# Altium PCB rNET_POE_Sensor_RevA1.PCBDOC (part 2 of 3)
Units mil, origin at the board's own origin, x right, y up, seen from the top; angles counter-clockwise.
Board outline 3750 x 2245 mil, 6 copper layers (TopLayer, Mid Layer 1, Mid Layer 2, Mid Layer 3, Mid Layer 4, BottomLayer), stack 60.4 mil thick; 269 components, 206 nets, 1048 pads, 579 vias.
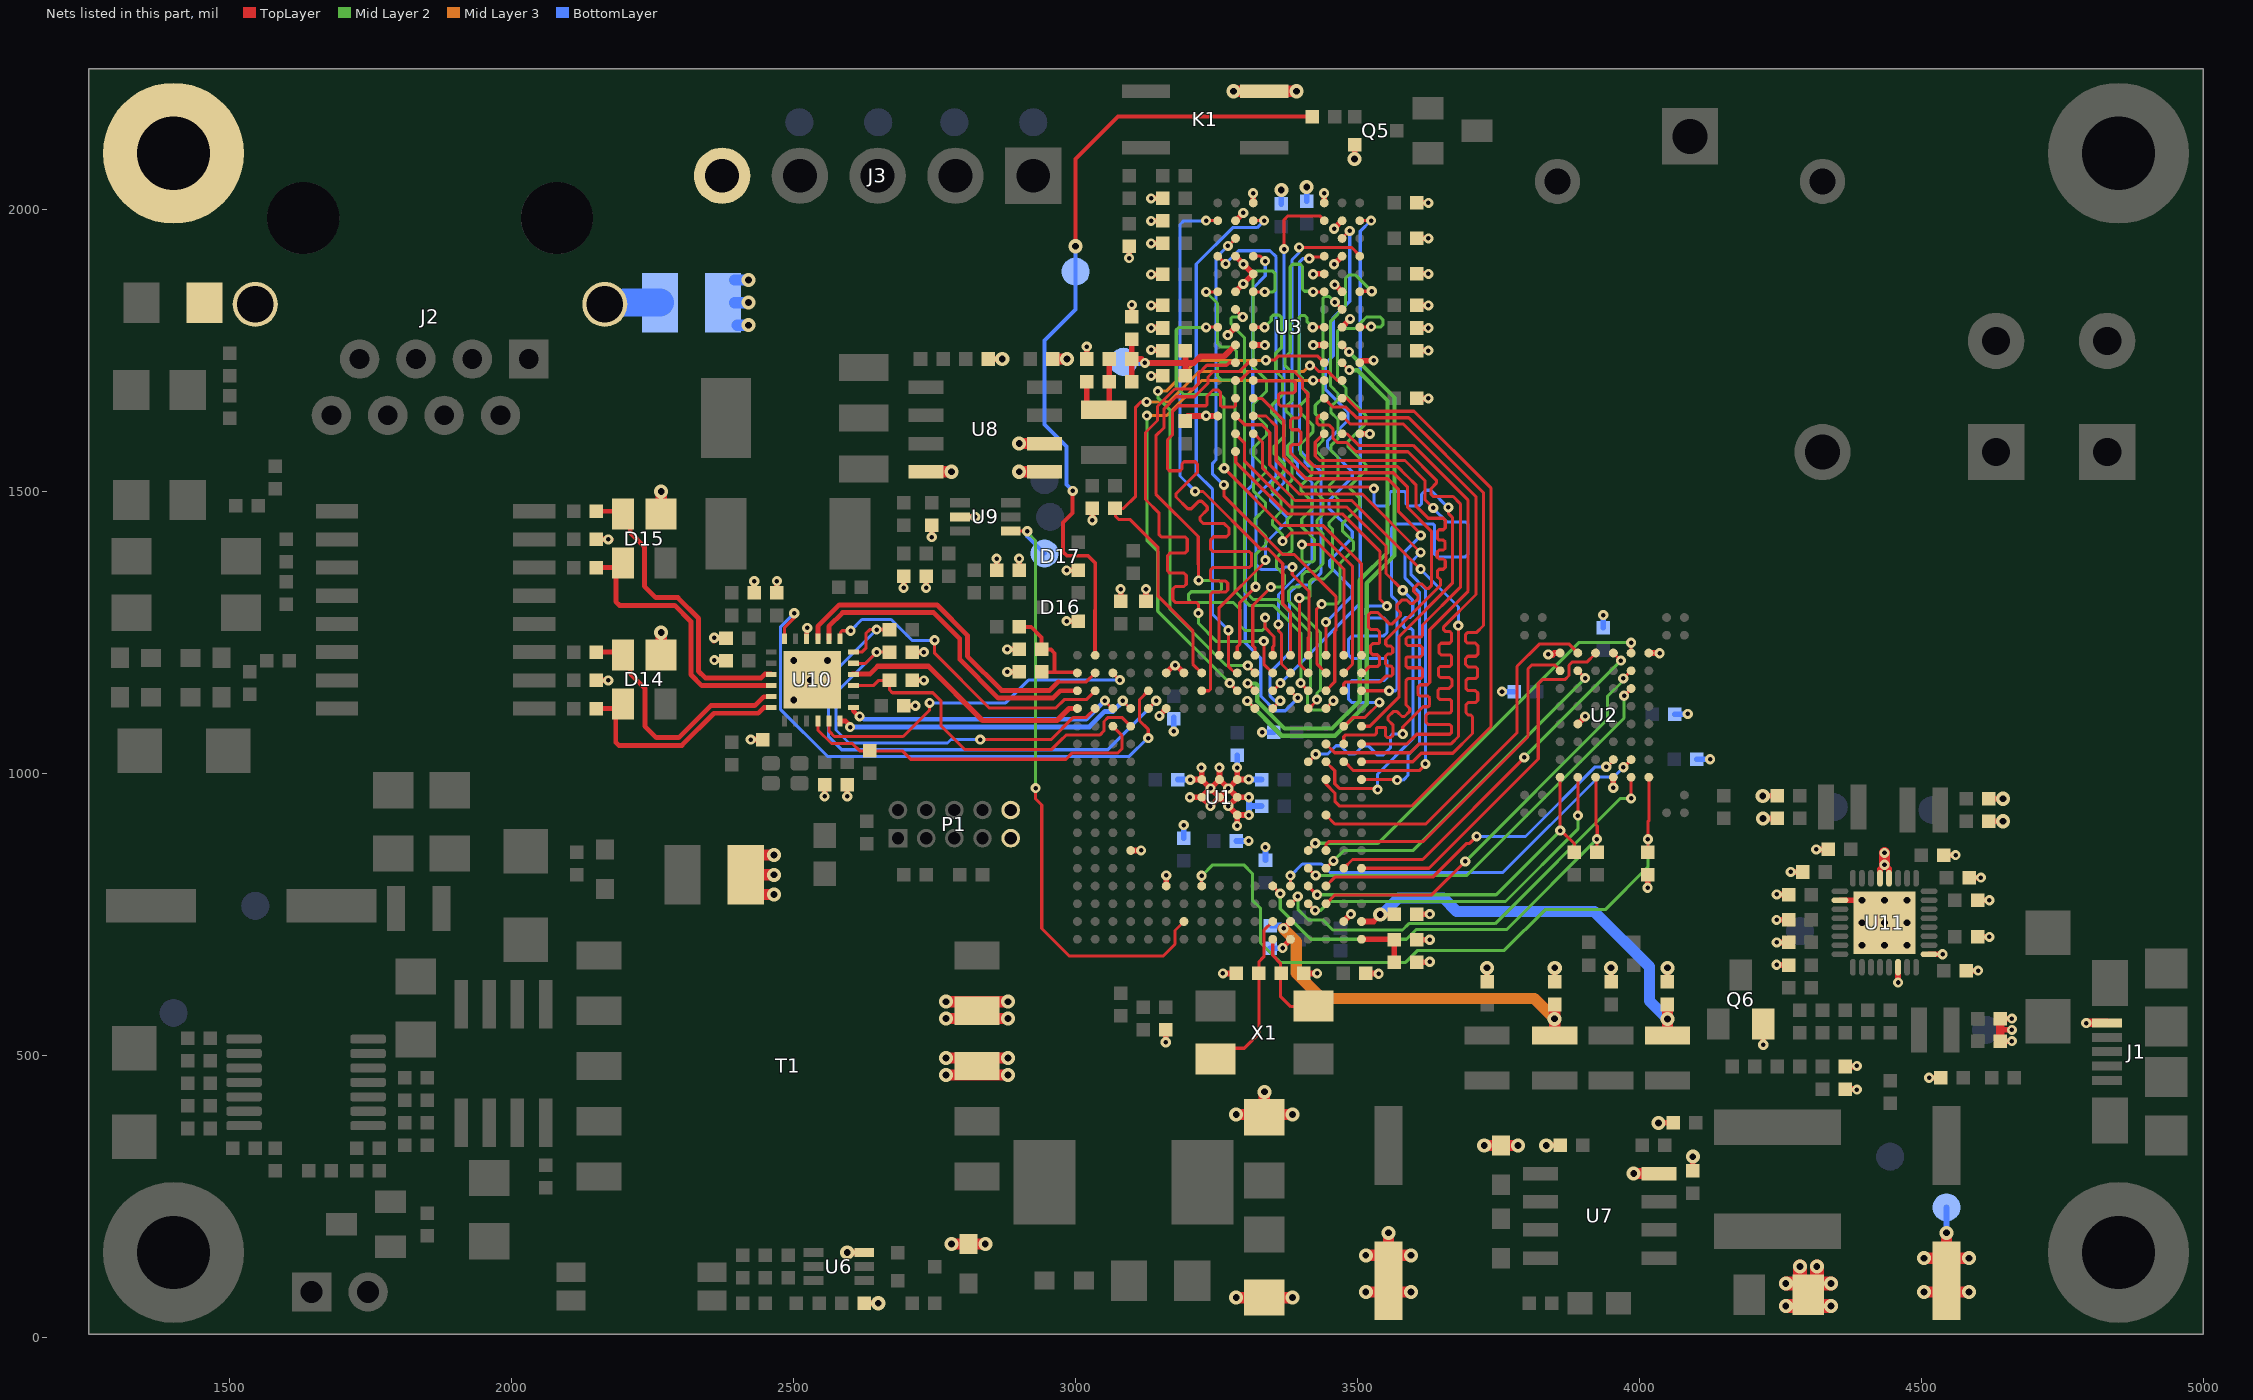
[diagram p6: the nets of this part, all layers, seen from the top]

## Via types
v1: diameter 25, hole 12, TopLayer to BottomLayer, 212 vias
v2: diameter 18, hole 8, TopLayer to BottomLayer, tented top, 187 vias
v3: diameter 18, hole 8, TopLayer to BottomLayer, 171 vias
v4: diameter 18, hole 8, TopLayer to BottomLayer, tented both sides, 7 vias
v5: diameter 25, hole 12, TopLayer to BottomLayer, tented top, 2 vias

## Nets (pads, with @x,y where several pads share a name; then routed paths per layer and width w, separated by ;. In a path a pad name is that pad's centre, name@x,y a point inside that pad or via, vN(x,y) a via of type N, cw(c..) or ccw(c..) an arc to the next point about the centre after c; other vN are vias at no path point) (continued)
AC_RELAY_ON: R63.2 TP12.1 U1.A2 | length 1437.2
  TopLayer w7: v3(2995,1501) 2995,1462 2978,1445 2978,1393 2985,1386 3022.04,1385.96 3034.95,1373.03 U1.A2@3034.8,1209.6 ; v1(3000,1935) 3000,2090 3075,2165 R63.2@3419,2165
  BottomLayer w7: v3(2995,1501) 2984,1512 2984,1580 2945,1619 2945,1768 3000,1823 TP12.1@3000,1890 v1(3000,1935) v1@3000,1946
CHASSIS: C40.2 C73.1 J2.11 J2.12 TP17.1 | length 63
  BottomLayer w50: J2.12@2200,1835 C40.2@2263,1835
"DAC SYNC": TP6.1 U1.T7 U9.1 | length 1111.5
  TopLayer w5.5: U9.1@2884.3,1430.7 2884.86,1429.9 2885,1429.7 2914.4,1429.81 v3@2914.6,1429.8 ; v3(2929,974) 2929,955 2940,944 2940,724.9 2989.2,675.7 3155.2,675.7 3176.5,697 3176.5,721.38 U1.T7@3192.28,737.16
  Mid Layer 2 w5.5: v3(2914.4,1429.5) 2914.1,1429.2 2914.1,1427.9 2929,1413 v3(2929,974)
  BottomLayer w8: v3@2914,1430 2914,1421 TP6.1@2945,1390
DDR2_A2: U1.H15 U3.M8 | length 1140.1
  TopLayer w5.5: U1.H15@3444.25,989.13 3444.25,988.55 U1.H15@3444.7,989 ; U1.H15@3444.7,989.7 U1.H15@3444.7,989 ; U3.M8@3472.3,1666.3 3479.9,1666.3 3503.8,1642.4 3600.4,1642.4 3737.2,1505.6 3737.2,1083.1 3595.9,941.8 3468.6,941.8 3460,950.4 3460,965.1 3444.7,980.4 U1.H15@3444.7,989
DDR2_A3: U1.H17 U3.M3 | length 1000.1
  TopLayer w5.5: U3.M3@3316.1,1664.3 3316.9,1665.1 3330.1,1665.1 3369.4,1625.8 3369.4,1562.2 3409,1522.6 3553.7,1522.6 3573.2,1503.1 3573.2,1463.8 3612.3,1424.7 v3(3612.3,1422.1) ; U1.H17@3507.24,989.13 3569.17,989.13 v3(3570.3,988)
  BottomLayer w5.5: v3(3570.3,988) 3581.1,988 3590.1,997 3590.1,1032.9 3609.8,1052.6 3609.8,1321.4 3584.1,1347.1 3584.1,1393.1 3611.7,1420.7 v3@3611.7,1420.8
DDR2_A4: U1.G17 U3.M7 | length 1133.2
  TopLayer w5.5: U3.M7@3436.6,1665.6 U3.M7@3441.4,1660.8 ; U3.M7@3441.9,1664.2 3456.3,1649.8 3479.6,1649.8 3498.6,1630.8 3590.9,1630.8 3723.8,1497.9 3723.8,1262.4 3710.9,1249.5 3695,1249.5 3692,1246.5 3692,1234.2 3694.9,1231.3 3709,1231.3 3713.7,1226.6 3713.7,1211.2 3710.2,1207.7 3696,1207.7 3692,1203.7 3692,1193.1 3696.1,1189 3709.4,1189 3713.3,1185.1 3713.3,1171.9 3709.9,1168.5 3696.4,1168.5 3692.3,1164.4 3692.3,1150.7 3696.2,1146.8 3709.3,1146.8 3713.4,1142.7 3713.4,1129.4 3709.4,1125.4 3696.1,1125.4 3692.5,1121.8 3692.5,1107.6 3696.3,1103.8 3700.7,1103.8 3704.3,1100.2 3704.3,1070.6 3669.4,1035.7 3613.3,1035.7 3598.22,1020.62 U1.G17@3507.24,1020.62
DDR2_A5: U1.G16 U3.N2 | length 1010.8
  TopLayer w5.5: U3.N2@3283.9,1634.3 3299.9,1618.3 3330.7,1618.3 3344.5,1604.5 3344.5,1547.5 3396.6,1495.4 3508.4,1495.4 3611.9,1391.9 v3(3612,1391.9) ; U1.G16@3475.74,1020.62 3477.38,1020.62 3493.1,1004.9 3609.7,1004.9 v3@3620.7,1015.9
  BottomLayer w5.5: 3602.2,1382.1 v3(3612,1391.9) ; 3602.4,1382.1 3594.8,1374.5 3594.8,1352.9 3620.6,1327.1 v3(3620.6,1016.9)
DDR2_A6: U1.F17 U3.N8 | length 1114.7
  TopLayer w5.5: U3.N8@3474.1,1633.1 3487.8,1619.4 3581.8,1619.4 3710.4,1490.8 3710.4,1317.3 3653,1259.9 3653,1254.5 3655.6,1251.9 3663.6,1251.9 3667,1248.5 3667,1234.1 3663.7,1230.8 3648.3,1230.8 3644.4,1226.9 3644.4,1214.1 3648.3,1210.2 3664.3,1210.2 3667,1207.5 3667,1192.7 3663.9,1189.6 3646.7,1189.6 3643.9,1186.8 3643.9,1173.3 3647.1,1170.1 3663.3,1170.1 3667.5,1165.9 3667.5,1155.4 3662.9,1150.8 3646.3,1150.8 3643,1147.5 3643,1134.4 3646.1,1131.3 3663.9,1131.3 3667.2,1128 3667.2,1110.5 3663.6,1106.9 3625.7,1106.9 3621.7,1102.9 3621.7,1090.4 3625.5,1086.6 3663.6,1086.6 3667.2,1083 3667.2,1072.7 3663.8,1069.3 3605,1069.3 3587.82,1052.12 U1.F17@3507.24,1052.12
DDR2_A7: U1.E17 U3.N3 | length 1007.3
  TopLayer w5.5: U3.N3@3315.29,1633.95 3337.95,1633.95 3356,1615.9 3356,1554.8 3402.6,1508.2 3526.2,1508.2 v3(3529.3,1505.1) ; U1.E17@3507.24,1083.62 3522.02,1083.62 3574.1,1135.7 3574.1,1242.7 3668.4,1337 3668.4,1454.2 3661.8,1460.8 v3@3661.8,1471.5
  BottomLayer w5.5: v3(3529.3,1505.1) 3529.3,1478 3532.8,1474.5 3553.2,1474.5 3556.8,1478.1 3556.8,1497 3560,1500.2 3583.2,1500.2 3586.4,1497 3586.4,1478.1 3590,1474.5 3609.9,1474.5 3613.7,1478.3 3613.7,1494.8 3621,1502.1 3630.5,1502.1 3661.3,1471.3 v3@3661.3,1471
  other v3: 3661.5,1471.6
DDR2_A8: U1.F16 U3.N7 | length 1118.8
  TopLayer w5.5: U3.N7@3441.5,1633 U3.N7@3441.9,1633.4 ; U3.N7@3441.5,1634.3 3432.1,1634.3 3428,1630.2 3428,1621.7 3431.5,1618.2 3449,1618.2 3456.9,1610.3 3456.9,1594 3464.1,1586.8 3481,1586.8 3497.4,1570.4 3589.8,1570.4 3640,1520.2 3640,1514.7 3630.7,1505.4 3630.7,1494.6 3634.3,1491 3669.8,1491 3682.7,1478.1 3682.7,1330.2 3615.6,1263.1 3615.6,1244.6 3613,1242 3589.4,1242 3586.2,1238.8 3586.2,1229.7 3589.2,1226.7 3611.6,1226.7 3615.4,1222.9 3615.4,1210 3612,1206.6 3588.7,1206.6 3586,1203.9 3586,1190.6 3589.2,1187.4 3612.8,1187.4 3615.8,1184.4 3615.8,1171.5 3612.7,1168.4 3590.4,1168.4 3586,1164 3586,1122 3592.9,1115.1 3592.9,1110.3 3583.5,1100.9 3579,1100.9 3570.5,1109.4 3563.6,1109.4 3554.4,1100.2 3554.4,1094.7 3562.9,1086.2 3562.9,1066.8 3559.6,1063.5 3552.7,1063.5 3550,1066.2 3550,1080.3 3548.7,1081.6 3536.1,1081.6 3533.65,1079.15 3533.65,1070.85 3530.6,1067.8 3478.5,1067.8 3475.74,1065.04 U1.F16@3475.74,1052.12
DDR2_A9: U1.G15 U3.P2 | length 1003.2
  TopLayer w5.5: U3.P2@3282.7,1603.9 3285.5,1601.1 U3.P2@3285.15,1600.75 ; U3.P2@3282.8,1598.4 U3.P2@3285.15,1600.75 ; U3.P2@3283.62,1602.28 U3.P2@3285.15,1600.75 ; U1.G15@3444.25,1020.62 3444.25,1020.25 3459.9,1004.6 3459.9,981.5 3468,973.4 3533.8,973.4 v3(3535.9,971.3) ; v3(3580.4,1324.8) 3550.6,1354.6 3550.6,1403.2 3481.5,1472.3 3381.8,1472.3 3299.5,1554.6 3299.5,1586.4 U3.P2@3285.15,1600.75
  BottomLayer w5.5: v3@3535.85,972.45 3535.85,998.85 3598.3,1061.3 3598.3,1253.8 3594.9,1257.2 3585.1,1257.2 3581.4,1260.9 3581.4,1272.8 3585.3,1276.7 3594.3,1276.7 3598.1,1280.5 3598.1,1306.8 v3@3580.3,1324.6 ; v3(3580.4,1324.8) v3@3580.7,1324.5
DDR2_A10: U1.G14 U3.P8 | length 1002.8
  TopLayer w5.5: U1.G14@3412.75,1020.62 3413.62,1020.62 3426,1033 v2(3426,1034) ; U3.P8@3472.4,1602 U3.P8@3473.22,1602 ; U3.P8@3475.15,1602.45 U3.P8@3472.77,1602.45 U3.P8@3473.22,1602 ; v3(3580.4,1069.8) 3580.4,1082.2 3616.4,1118.2 3625.4,1118.2 3628.2,1121 3628.2,1133.9 3624.9,1137.2 3610.7,1137.2 3607.3,1140.6 3607.3,1152.8 3611.6,1157.1 3624.3,1157.1 3628.3,1161.1 3628.3,1255 3696.5,1323.2 3696.5,1484.2 3598.9,1581.8 3502.1,1581.8 3481.9,1602 U3.P8@3473.22,1602
  BottomLayer w5.5: v2(3426,1034) 3447,1034 3462,1049 3470,1049 3485,1034 3495,1034 3510,1049 3519,1049 3535,1033 3546,1033 3559,1046 3559,1066 3563,1070 v3@3580,1070 ; v3@3580.4,1069.4 v3(3580.4,1069.8)
DDR2_A11: U1.F15 U3.P3 | length 1002.1
  TopLayer w5.5: U3.P3@3315.6,1603 3316.1,1603 3331.4,1587.7 3331.4,1542 3389.3,1484.1 3490.05,1484.1 3611.85,1362.3 v3(3612,1362.3) ; U1.F15@3444.25,1052.12 3459.87,1036.5 3593.9,1036.5 3609.7,1052.3 3666.2,1052.3 3679.3,1065.4 3679.3,1261.7 v3(3679,1262)
  BottomLayer w5.5: v3@3611.5,1362.8 v3(3612,1362.3) 3679.3,1295 3679.3,1262.3 v3(3679,1262)
DDR2_A13: U1.C17 U3.P7 | length 990.9
  TopLayer w5.5: U3.P7@3441.1,1601.9 U3.P7@3442.2,1603 ; U3.P7@3441.6,1601.5 3439.1,1601.5 3425.2,1587.6 3425.2,1563 3433.3,1554.9 3584.3,1554.9 ; U1.C17@3507.24,1146.61 3555.91,1146.61 3556.2,1146.9 v3(3556.2,1146.6) ; 3584.5,1554.9 3584.3,1554.9 ; v3@3634.65,1470.65 3620,1485.3 3620,1519.2 3584.3,1554.9
  BottomLayer w5.5: v3(3556.2,1146.6) 3567.1,1146.6 3570.2,1149.7 3570.2,1305 3560.8,1314.4 3560.8,1435.4 3567.8,1442.4 3634.5,1442.4 3636.6,1440.3 3636.6,1389.6 3642.2,1384 3691.3,1384 3696.5,1389.2 3696.5,1441.7 3692.1,1446.1 3658.3,1446.1 v3@3634.7,1469.7
  other v3: 3634.5,1471
DDR2_A14: U1.E16 U3.R2 | length 1000.2
  TopLayer w5.5: U3.R2@3283.6,1570.9 U3.R2@3284.15,1570.35 ; U3.R2@3284.6,1570.8 U3.R2@3284.15,1570.35 ; U1.E16@3475.74,1083.62 3475.74,1082.46 3492.58,1099.3 3513.52,1099.3 3539.1,1124.88 v2(3539.1,1125.7) ; v3(3552.2,1296.8) 3539.8,1309.2 3539.8,1393.8 3473.2,1460.4 3375.6,1460.4 3284.15,1551.85 U3.R2@3284.15,1570.35
  BottomLayer w5.5: v2@3539.4,1125.7 v2(3539.1,1125.7) 3490,1125.7 3484.5,1131.2 3484.5,1159.4 3489.9,1164.8 3548.2,1164.8 3552.5,1169.1 3552.5,1200 3549,1203.5 3490.3,1203.5 3484.5,1209.3 3484.5,1237.8 3490.5,1243.8 3546.7,1243.8 3552.6,1249.7 3552.6,1270.1 3546.8,1275.9 3519.9,1275.9 3515.1,1280.7 3515.1,1291.1 3520.7,1296.7 v3@3552.5,1296.7
DDR2_A16: U1.C16 U3.L2 | length 1096.5
  TopLayer w5.5: U3.L2@3281.9,1699 3294.2,1699 3307.9,1712.7 3387.5,1712.7 3402.5,1697.7 3402.5,1682.8 3412,1673.3 ; 3412.1,1673.2 3412,1673.3 ; U1.C16@3475.74,1146.61 3475.74,1158.74 3479.4,1162.4 3540.4,1162.4 3550.5,1172.5 ; 3550.7,1172.5 3559.6,1172.5 3562.7,1175.6 3562.7,1187 3559,1190.7 3553.2,1190.7 3549.9,1194 3549.9,1207.9 3553.6,1211.6 3559.5,1211.6 3562.7,1214.8 3562.7,1222.5 3559.6,1225.6 3553.8,1225.6 3550.3,1229.1 3550.3,1236.6 3647.4,1333.7 ; 3412,1673.3 3412,1556.3 3424.3,1544 3571.3,1544 3586.85,1528.45 3587.05,1528.45 3604.2,1511.3 3604.2,1473.8 3625.4,1452.6 3652.7,1452.6 3655.8,1449.5 3655.8,1435.7 3652.3,1432.2 3645.2,1432.2 3641.9,1428.9 3641.9,1417 3645.2,1413.7 3652.5,1413.7 3655.6,1410.6 3655.6,1399.1 3652.8,1396.3 3645.1,1396.3 3641.7,1392.9 3641.7,1383.1 3644.7,1380.1 3652.6,1380.1 3655.8,1376.9 3655.8,1365.5 3652.4,1362.1 3645.2,1362.1 3641.9,1358.8 3641.9,1348.8 3647.35,1343.35 ; 3647.35,1343.35 3647.4,1333.7 ; 3647.35,1343.35 3647.4,1343.3 3647.4,1333.7
DDR2_A17: U1.B17 U3.L3 | length 1097.6
  TopLayer w5.5: U3.L3@3315.3,1696.3 3377.7,1696.3 3386.2,1696.3 3390.4,1692.1 3390.4,1678.6 3386.8,1675 3363.5,1675 3359.7,1671.2 3359.7,1655.8 3363.7,1651.8 3395.8,1651.8 3399.9,1647.7 3399.9,1634.8 3395.5,1630.4 3385.5,1630.4 3381.4,1626.3 3381.4,1612.5 3384.4,1609.5 3395.3,1609.5 3399.7,1605.1 3399.7,1587.1 3395.6,1583 3384.6,1583 3381.1,1579.5 3381.1,1572.1 3381.2,1572 3381.2,1568.7 3416.7,1533.2 3563.6,1533.2 3589.2,1507.6 3589.2,1471.7 3631.2,1429.7 3631.2,1332.8 3626.5,1328.1 3621.8,1328.1 3613.8,1336.1 3607.9,1336.1 3600,1328.2 3600,1322.7 3607.8,1314.9 3607.8,1310 3599.3,1301.5 3593.5,1301.5 3587.2,1307.8 3579.6,1307.8 3570,1298.2 3570,1291.4 3576.4,1285 3576.4,1279.6 3562,1265.2 3556.2,1265.2 3536.2,1285.2 3523.7,1285.2 3519.4,1280.9 3519.4,1259.7 3524.2,1254.9 3535.7,1254.9 3539.2,1251.4 3539.2,1231.6 3537.7,1230.1 3527.2,1230.1 3523,1225.9 3523,1214.6 3527.3,1210.3 3535.4,1210.3 3538.9,1206.8 3538.9,1192.7 3535.4,1189.2 3521.2,1189.2 3510.1,1178.1 U1.B17@3507.24,1178.1
DDR2_CAS: U1.C10 U3.L7 | length 902.1
  TopLayer w5.5: v2(3273.5,1160.1) 3273.5,1159.87 U1.C10@3286.76,1146.61 ; v2@3421.24,1696.94 U3.L7@3441.28,1696.94
  Mid Layer 2 w5.5: v3@3122.2,1630.2 v3@3126.3,1634.3 ; v3(3126.5,1634.5) 3126.5,1413.5 3145.9,1394.1 3145.9,1287.8 3273.5,1160.2 v2(3273.5,1160.1) v2@3273.5,1159.9 ; v2@3273.5,1159.9 3273.8,1159.9 3273.5,1159.6 v2@3273.5,1159.9
  Mid Layer 3 w5.5: v3(3126.5,1634.5) 3161.5,1634.5 3223.9,1696.9 v2(3421.4,1696.9)
DDR2_DQM0: U1.A10 U3.F3 | length 892.7
  TopLayer w5.5: U1.A10@3287.1,1209.2 3286.8,1209.5 3286.8,1224.7 3291.3,1229.2 3291.3,1302.9 v3(3319.5,1331.1) ; U3.F3@3315,1854.5 3315.5,1854 v2(3335.6,1854)
  Mid Layer 2 w5.5: v3(3319.5,1331.1) 3319.5,1388.5 3337.8,1406.8 3337.8,1420.4 3318,1440.2 3318,1450.9 3337,1469.9 3337,1480 3315.5,1501.5 3315.5,1512.2 3337,1533.7 3337,1542.6 3315.8,1563.8 3315.8,1577.3 3338.8,1600.3 3338.8,1617 3314.9,1640.9 3314.9,1654.32 3338.9,1678.32 3338.9,1697.4 3314.9,1721.4 3314.9,1885.1 3321.2,1891.4 3348.9,1891.4 3354,1886.3 3354,1857.6 3350.5,1854.1 v2@3335.2,1854.1
DDR2_DQM1: U1.B10 U3.B3 | length 933.5
  TopLayer w5.5: v3(3271.1,1253.9) 3271.1,1189.8 3282.8,1178.1 U1.B10@3286.76,1178.1 ; U3.B3@3315.6,1980.5 v2@3334.1,1980.5
  BottomLayer w5.5: v3@3270.7,1257 v3@3270.8,1256.9 ; v3@3270.8,1252.7 v3@3270.8,1254.2 ; v3@3271.1,1256.6 v3@3270.8,1256.9 ; v3@3271.3,1253.7 v3(3271.1,1253.9) v3@3270.8,1254.2 ; v2(3334.4,1980.5) 3334.4,1980.4 3322.1,1968.1 3278.7,1968.1 3214.2,1903.6 3214.2,1532.8 3243.3,1503.7 3243.3,1281.7 v3@3270.8,1254.2 ; v3@3270.8,1254.2 v3@3270.8,1256.9
DDR2_DQS0: U1.A11 U3.F7 | length 893.2
  TopLayer w5.5: U1.A11@3318.2,1211 3318.2,1222.9 3314.3,1226.8 3314.3,1297.7 3346.6,1330 v3(3346.6,1330.3) ; v2(3421.5,1854.1) 3439.4,1854.1 U3.F7@3440.6,1855.3
  Mid Layer 2 w5.5: v3@3345.7,1330.4 v3@3346.6,1330.4 ; v3(3346.6,1330.3) v3@3346.6,1330.4 ; 3406.4,1855.1 3402.5,1859 3402.5,1899 3398.4,1903.1 3385.5,1903.1 3380.9,1898.5 3380.9,1747.3 3371.3,1737.7 3371.3,1724.1 3384.2,1711.2 3384.2,1661.4 3373.1,1650.3 3373.1,1643.2 3384.2,1632.1 3384.2,1589.1 3376.4,1581.3 3376.4,1565.03 3384.2,1557.23 3384.2,1521 3375.9,1512.7 3375.9,1498.6 3384.2,1490.3 3384.2,1459.2 3376.2,1451.2 3376.2,1438.8 3384.2,1430.8 3384.2,1396 3377.6,1389.4 3363.1,1389.4 3356.7,1383 3356.7,1365.1 3371,1350.8 3371,1337.2 3364.2,1330.4 v3@3346.6,1330.4 ; 3406.7,1855.1 v2@3421.5,1855.1
DDR2_DQS1: U1.A9 U3.B7 | length 927.1
  TopLayer w5.5: U1.A9@3255.4,1209.8 3254.25,1210.95 3254.25,1293.05 3336.9,1375.7 v3(3336.9,1378.2) ; v2(3370,1930) 3370,1982 3377,1989 3433.17,1989 3441.28,1980.9 U3.B7@3442.5,1980.9
  BottomLayer w5.5: v3(3336.9,1378.2) 3336.9,1408.7 3375.5,1447.3 3375.5,1453.8 3346.2,1483.1 3346.2,1491.7 3369.6,1515.1 v2@3369.6,1933.6
DDR2_NCS1: R1.1 U1.B8 U3.L8 | length 974.6
  TopLayer w5.5: v3(3126,1659) 3116,1659 3106.6,1649.6 3106.6,1491.6 3085,1470 3071,1470 3071,1456 3077,1450 3097,1450 3146,1401 3146,1314.8 3208.1,1252.7 3208.1,1193.78 U1.B8@3223.77,1178.1 ; v2@3418.05,1724.25 3420.35,1724.25 3432,1712.6 3448.5,1712.6 3464.2,1696.9 U3.L8@3472.1,1696.9
  Mid Layer 3 w5.5: v3(3126,1659) 3166,1659 3220,1713 3405.4,1713 v2(3415.8,1723.4)
DDR2_NSDCK: U1.C11 U3.K8 | length 941.4
  TopLayer w5.5: v2(3305.3,1159.6) U1.C11@3318.26,1146.61 ; U3.K8@3472.8,1727.8 3485.9,1714.7 v2(3485.9,1715.2)
  Mid Layer 2 w7.5: v2(3305.3,1159.6) 3319.7,1159.6 3322.5,1156.8 3322.5,1127.9 3371,1079.4 3455.1,1079.4 3504.2,1128.5 3504.2,1342.7 3553.4,1391.9 3553.4,1661.6 3499.8,1715.2 v2@3494.5,1715.2
DDR2_RAS: U1.B11 U3.K7 | length 918.5
  TopLayer w5.5: v2(3305.4,1191.2) 3305.4,1190.97 U1.B11@3318.26,1178.1 ; v2(3337.6,1732.9) 3352.5,1732.9 3360.2,1740.6 3428.9,1740.6 U3.K7@3440.4,1729.1 ; U3.K7@3441.7,1728 U3.K7@3441.7,1728.4
  Mid Layer 2 w5.5: v2(3146,1678) 3146,1666 3167.3,1644.7 3167.3,1291.4 3267.5,1191.2 v2(3305.4,1191.2)
  Mid Layer 3 w5.5: v2(3146,1678) 3161,1678 3215.6,1732.6 v2@3337.3,1732.6
DDR2_SDA10: U1.C8 U3.M2 | length 1101.1
  TopLayer w5.5: U1.C8@3223.77,1146.61 3236.51,1146.61 3239.6,1149.7 3239.6,1318.1 3243.2,1321.7 3266.4,1321.7 3270,1325.3 3270,1337.2 3266.2,1341 3243.2,1341 3239.7,1344.5 3239.7,1361 3244,1365.3 3308.5,1365.3 3312.3,1369.1 3312.3,1389.5 3308.5,1393.3 3243.9,1393.3 3239.7,1397.5 3239.7,1414.2 3245.2,1419.7 3267.7,1419.7 3272.1,1424.1 3272.1,1435 3264.1,1443 3226.9,1443 3220.8,1449.1 3220.8,1454.7 3233.6,1467.5 3233.6,1472.7 3223.6,1482.7 3218.7,1482.7 3205.3,1469.3 3199.2,1469.3 3178.3,1490.2 3178.3,1495.9 3216.2,1533.8 3216.2,1548.8 3212.3,1552.7 3192.7,1552.7 3189,1549 3189,1540 3185.7,1536.7 3166.3,1536.7 3163.2,1539.8 3163.2,1591.6 3171.7,1600.1 3171.7,1641.4 3182.3,1652 3231,1652 3233.4,1654.4 3233.4,1669.4 3243.9,1679.9 3253.1,1679.9 3257,1676 3257,1653 3260.1,1649.9 3281.7,1649.9 3283.9,1652.1 U3.M2@3283.9,1665.6
DDR2_SDCK: U1.D11 U3.J8 | length 976.4
  TopLayer w5.5: v2(3304.6,1128.4) 3304.97,1128.4 U1.D11@3318.26,1115.11 ; U3.J8@3472.6,1759.5 3484.5,1747.6 v2(3485.3,1747.6)
  Mid Layer 2 w7.5: v2(3304.6,1128.4) 3304.6,1128.1 3365.9,1066.8 3460.4,1066.8 3516.7,1123.1 3516.7,1337.4 3565.9,1386.6 3565.9,1666.9 3486,1746.8 v2@3484.7,1746.8
DDR2_SDCKE: U1.B12 U3.K2 | length 945.6
  TopLayer w5.5: v3(3218.1,1284.4) 3218.1,1299.6 3214.8,1302.9 3177.6,1302.9 3172.4,1308.1 3172.4,1326.7 3177.1,1331.4 3192.3,1331.4 3196.4,1335.5 3196.4,1351.2 3192.4,1355.2 3166.9,1355.2 3163,1359.1 3163,1386.1 3168.1,1391.2 3194.6,1391.2 3198.2,1394.8 3198.2,1415.8 3194.8,1419.2 3152.2,1419.2 3148.3,1423.1 3148.3,1461.6 3124.2,1485.7 3124.2,1604.7 3145.4,1625.9 3145.4,1650.9 3176.5,1682 3209,1682 3218,1691 3218,1709 3233,1724 3268.1,1724 3272.54,1728.44 U3.K2@3283.8,1728.44 ; v2(3333.9,1234.7) 3334.13,1234.47 3334.13,1193.67 3349.7,1178.1 U1.B12@3349.76,1178.1
  Mid Layer 2 w5.5: v3(3218.1,1284.4) 3218.1,1266 3250.4,1233.7 3327.9,1233.7 v2@3335.3,1241.1
DDR2_SDWE: U1.A12 U3.K3 | length 937.1
  TopLayer w5.5: v3@3217.8,1342.1 3217.8,1370.5 3217.6,1370.7 3217.6,1420.1 3142.5,1495.2 3142.5,1598.9 3157.1,1613.5 3157.1,1646.8 3178.3,1668 3211,1668 3235,1692 3235,1703 3244.8,1712.8 3290.7,1712.8 3306.34,1728.44 U3.K3@3315.29,1728.44 ; v3(3336.3,1276.2) 3336.3,1258.5 3351.9,1242.9 3351.9,1226.2 3349.8,1224.1 U1.A12@3349.8,1207.2
  Mid Layer 2 w5.5: v3(3218.4,1342.2) 3218.5,1342.1 3254.1,1342.1 3259,1337.2 3259,1326.1 3255.1,1322.2 3205.1,1322.2 3200.7,1317.8 3200.7,1307.7 3205.2,1303.2 3279.7,1303.2 3291.5,1291.4 3291.5,1262.3 3300.5,1253.3 3331.4,1253.3 3336.3,1258.2 v3@3336.3,1275.8
DQ0: U1.D14 U3.G8 | length 892.6
  TopLayer w5.5: U1.D14@3412.75,1115.11 3412.75,1113.65 3428.3,1129.2 v2(3428.3,1130.7) ; v2(3460,1836) 3460.9,1836 U3.G8@3473.4,1823.5
  Mid Layer 2 w5.5: v2(3428.3,1130.7) 3428.3,1142.4 3434.5,1148.6 3434.5,1249.5 3377.8,1306.2 3377.8,1323.5 3384.7,1330.4 3396.4,1330.4 3402,1336 3402,1352 3408.1,1358.1 3425.1,1358.1 3439,1372 3439,1425.6 3428.4,1436.2 3428.4,1448.7 3439,1459.3 3439,1486.5 3425.4,1500.1 3425.4,1512.3 3439,1525.9 3439,1559.5 3427.6,1570.9 3427.6,1579.1 3439,1590.5 3439,1624.3 3425.3,1638 3425.3,1652.8 3439,1666.5 3439,1842.7 3442.1,1845.8 3450,1845.8 v2@3460,1835.8 ; v2@3460,1834.7 v2@3460,1835.8 ; v2(3460,1836) v2@3460,1835.8 ; v2@3460.2,1835.6 v2@3460,1835.8
DQ1: U1.D15 U3.G2 | length 892.4
  TopLayer w5.5: U3.G2@3283.8,1822.2 3283.44,1822.56 v2@3296.85,1809.15 ; U1.D15@3444.25,1115.11 3457.4,1128.27 v2(3457.4,1128.9)
  Mid Layer 2 w5.5: v2@3296.6,1808.9 v2@3296.6,1809.2 ; v2@3296.6,1809.9 v2(3296.6,1809.5) v2@3296.6,1809.2 ; v2@3296.8,1809.2 v2@3296.6,1809.2 ; v2(3457.4,1128.9) 3457.4,1128.6 3441.3,1112.5 3416.2,1112.5 3411.4,1117.3 3411.4,1144.6 3416.6,1149.8 3416.6,1249.9 3357.9,1308.6 3314.7,1308.6 3299.7,1323.6 3299.7,1773 3275.7,1797 3275.7,1807.4 3277.5,1809.2 v2@3296.6,1809.2
DQ2: U1.A16 U3.H7 | length 857.6
  TopLayer w5.5: v3(3401.5,1405.8) 3432.7,1405.8 3476.3,1362.2 3476.3,1210.16 U1.A16@3475.74,1209.6 ; v2@3427.07,1791.43 U3.H7@3441.28,1791.43
  Mid Layer 2 w5.5: v3@3401.4,1406 3401.4,1378.7 3405.3,1374.8 3420.5,1374.8 3424,1378.3 3424,1414.7 3401.2,1437.5 3401.2,1451.1 3419.7,1469.6 3419.7,1481.5 3400.1,1501.1 3400.1,1511.2 3419.7,1530.8 3419.7,1545.8 3399,1566.5 3399,1583.2 3421,1605.2 3421,1617.7 3398.5,1640.2 3398.5,1653 3412.6,1667.1 3412.6,1674.5 3402.7,1684.4 3402.7,1700.7 ; 3402.7,1700.8 3402.7,1700.7 ; 3402.8,1700.6 3402.7,1700.7 ; v2@3419.2,1791.4 v2(3420.7,1791.4) ; v2@3421,1791.1 v2(3420.7,1791.4) ; v2@3422.9,1794.3 v2@3422.9,1795.7 ; 3402.7,1700.7 3396.7,1706.7 3396.7,1808.8 3400,1812.1 3406.8,1812.1 3410.3,1808.6 3410.3,1801.8 v2(3420.7,1791.4)
DQ3: U1.B16 U3.H3 | length 883.7
  TopLayer w5.5: U3.H3@3315.8,1791.3 v2(3335.4,1791.3) ; v3(3367.2,1412) 3381.3,1426.1 3432.7,1426.1 3491.4,1367.4 3491.4,1193.76 U1.B16@3475.74,1178.1 U1.B16@3478.1,1178.1
  Mid Layer 2 w5.5: v2(3335.4,1791.3) 3335.2,1791.3 3347.1,1803.2 3347.1,1809.5 3350.5,1812.9 3361.2,1812.9 3365.2,1808.9 3365.2,1755.1 3355.2,1745.1 3355.2,1713.3 3367.2,1701.3 3367.2,1671.88 3348.1,1652.77 3348.1,1639.6 3370.2,1617.5 3370.2,1597.7 3351.8,1579.3 3351.8,1567.6 3370.2,1549.2 3370.2,1535.6 3349,1514.4 3349,1501.5 3364.6,1485.9 3364.6,1464.5 3349.6,1449.5 3349.6,1440.8 3367.2,1423.2 v3(3367.2,1412)
DQ4: U1.A17 U3.H1 | length 892.7
  TopLayer w5.5: v2(3231.5,1791.1) 3233.7,1791.1 v2@3234.6,1790.2 ; v2@3231.47,1791.43 U3.H1@3252.3,1791.43 ; v2(3263.7,1541.1) 3263.8,1541.1 3365.4,1439.5 3439.7,1439.5 3507.24,1371.96 U1.A17@3507.24,1209.6
  Mid Layer 2 w5.5: v2@3232.8,1790.9 3182.9,1790.9 3178.7,1786.7 3178.7,1685.3 3192,1672 3257,1672 3263.4,1665.6 3263.4,1547.3 3269.6,1541.1 v2(3263.7,1541.1) 3255.2,1541.1 3254.6,1540.5
DQ5: U1.B15 U3.H9 | length 891.9
  TopLayer w5.5: v3(3436.4,1300.2) 3427.35,1291.15 3427.35,1254.85 3428.6,1253.6 3428.6,1193.75 U1.B15@3444.25,1178.1 ; U3.H9@3504.1,1791.8 3503.97,1791.8 3504.27,1791.8 3524.3,1791.8 3524.36,1791.68 3524.4,1791.6 3524.7,1791.6 v2@3524.52,1791.68
  Mid Layer 2 w5.5: v3(3436.4,1300.2) 3463.1,1300.2 3469,1306.1 3469,1372.6 3493.2,1396.8 3493.2,1410.6 3473.4,1430.4 3473.4,1442.8 3504.1,1473.5 3504.1,1487.8 3487.2,1504.7 3487.2,1510.1 3514.8,1537.7 3514.8,1547.8 3483.5,1579.1 3483.5,1589.1 3514.8,1620.4 3514.8,1635 3479.7,1670.1 3479.7,1683.6 3464.9,1698.4 3464.9,1784.9 3469,1789 3495.8,1789 3506.9,1800.1 3506.9,1800.3 3516,1809.4 3540.7,1809.4 3545.2,1804.9 3545.2,1795.7 3541,1791.5 v2@3524.4,1791.5 ; v2@3522.2,1789.5 3524.4,1791.7 v2(3524.4,1792.5)
DQ6: U1.C14 U3.F1 | length 889.3
  TopLayer w5.5: v2(3231.5,1854.1) U3.F1@3251.1,1854.1 ; v2(3399.3,1160) 3399.36,1160 U1.C14@3412.75,1146.61
  Mid Layer 2 w5.5: v2@3230.5,1852.1 3233.3,1852.1 3251.7,1833.7 3251.7,1762.7 3257.8,1756.6 3277.7,1756.6 3285.5,1748.8 3285.5,1735.9 3278.7,1729.1 3258,1729.1 3251.8,1722.9 3251.8,1704.7 3258.7,1697.8 3275.5,1697.8 3283,1690.3 3283,1323.1 3308,1298.1 3350.5,1298.1 3400,1248.6 3400,1160.7 v2(3399.3,1160)
DQ7: U1.B14 U3.F9 | length 892.9
  TopLayer w5.5: v3(3396.8,1310.9) 3397,1310.7 3397,1193.85 U1.B14@3412.75,1178.1 ; U3.F9@3506.3,1855.3 3506.5,1855.1 v2(3525.5,1855.1) v2@3526.5,1855.1
  Mid Layer 2 w5.5: v3(3396.8,1310.9) 3412.5,1310.9 3415.4,1313.8 3415.4,1339.8 3420.1,1344.5 3439.9,1344.5 3455.9,1360.5 3455.9,1433.3 3449.7,1439.5 3449.7,1444.8 3465.7,1460.8 3465.7,1486.8 3450.4,1502.1 3450.4,1511.3 3465.7,1526.6 3465.7,1560.5 3453,1573.2 3453,1580.9 3465.7,1593.6 3465.7,1627.7 3453,1640.4 3453,1650.2 3465.7,1662.9 3465.7,1673.9 3452.6,1687 3452.6,1802 3478.9,1828.3 3478.9,1878.1 3485,1884.2 3496.3,1884.2 3525.6,1854.9 v2@3525.6,1854.8
DQ8: U1.A15 U3.C8 | length 927.8
  TopLayer w5.5: v3(3444.1,1268.3) 3444.25,1268.15 U1.A15@3444.25,1209.6 ; U3.C8@3472.3,1948.6 3472.69,1948.99 v2@3487.1,1963.4
  BottomLayer w5.5: v3(3444.1,1268.3) 3444.3,1268.3 3490.9,1314.9 3490.9,1327.5 3450.8,1367.6 3450.8,1377.7 3490.9,1417.8 3490.9,1428.9 3449.3,1470.5 3449.3,1483.5 3490.9,1525.1 3490.9,1535.2 3447.1,1579 3447.1,1590.1 3483,1626 3483,1641.65 3443.2,1681.45 3443.2,1726.75 3457.2,1740.75 3457.2,1807.6 ; 3457.4,1807.8 3457.2,1807.6 ; v2@3485.5,1961.1 3486.5,1960.1 3486.5,1837.5 3457.2,1808.2 3457.2,1807.6
  other v2: 3486.5,1962.1
DQ9: U1.C15 U3.C2 | length 933.3
  TopLayer w5.5: v3(3263.1,1511.7) 3263.1,1492.41 3367.11,1388.4 3387.4,1388.4 3461.8,1314 3461.8,1253.6 3459.87,1251.67 3459.87,1162.23 U1.C15@3444.25,1146.61 ; v2(3270.2,1935.5) 3271,1935.5 U3.C2@3284.1,1948.6
  BottomLayer w5.5: v3@3262.8,1511 3243.3,1530.5 3243.3,1550.1 3249,1555.8 3249,1914.3 v2(3270.2,1935.5) 3270.2,1935.6 v2@3269.6,1936.2 ; v3@3263.3,1510.9 v3@3266.1,1510.9
DQ10: U1.D12 U3.D7 | length 927.5
  TopLayer w5.5: U1.D12@3349.76,1115.11 3363.2,1128.6 v2(3363.2,1128.7) ; v2(3414.5,1913.1) 3417.5,1916.1 U3.D7@3439.6,1916.1
  BottomLayer w5.5: v2@3363.5,1128.6 3353.5,1128.6 3345.2,1136.9 3345.2,1179.2 3379.4,1213.4 3379.4,1319.9 3393.35,1333.85 3413.95,1333.85 3435.2,1355.1 3435.2,1535.6 3425.78,1545.02 3413.47,1545.02 3406.93,1551.57 3406.93,1563.88 3397.5,1573.3 3397.5,1907.8 3402.8,1913.1 v2@3412.5,1913.1
DQ11: U1.C13 U3.D3 | length 928.9
  TopLayer w5.5: U3.D3@3315.3,1917.7 3315.4,1917.6 3327.5,1917.6 v2(3336.4,1908.7) ; U1.C13@3382.3,1145.3 3393.8,1133.8 v2(3394.3,1133.8)
  BottomLayer w5.5: v2@3336.6,1912.5 3336.6,1882.4 3314.4,1860.2 3314.4,1511.8 3301,1498.4 3301,1231.6 3328.5,1204.1 3328.5,1137.1 3354.5,1111.1 3372.1,1111.1 3393.2,1132.2 v2@3394.8,1132.2
DQ12: U1.A14 U3.D1 | length 927.8
  TopLayer w5.5: U3.D1@3252.3,1917.41 3265.71,1904 v2@3266,1904 ; v2@3387.8,1369.2 3384.5,1365.9 3384.5,1352.7 3413.8,1323.4 3413.8,1242.1 3412.75,1241.05 U1.A14@3412.75,1209.6
  BottomLayer w5.5: v2@3266.1,1904 3289.1,1927 3344.9,1927 3355.8,1916.1 3355.8,1527 3319.9,1491.1 3319.9,1371.2 3329.7,1361.4 3367.8,1361.4 3372.3,1365.9 v2(3384.6,1365.9) v2@3384.9,1366.2 ; v2@3387.9,1368.4 v2@3387.9,1368.8
  other v2: 3266.1,1903.8
DQ13: U1.B13 U3.D9 | length 928.2
  TopLayer w5.5: v3(3359.9,1264.1) 3359.9,1253 3365.4,1247.5 3365.4,1193.96 U1.B13@3381.25,1178.1 ; v2(3396.5,1933.1) 3489.5,1933.1 3504.4,1918.2 U3.D9@3504.1,1918.2
  BottomLayer w5.5: v3(3359.9,1264.1) 3359.9,1317.2 3419.5,1376.8 3419.5,1516 3412.1,1523.4 3403.3,1523.4 3393.4,1533.3 3393.4,1549.8 3383.9,1559.3 3383.9,1910.9 3396.5,1923.5 v2(3396.5,1933.1) v2@3396.5,1933.3
DQ14: U1.A13 U3.B1 | length 927.2
  TopLayer w5.5: v3(3212.2,1500.1) 3226,1500.1 3327.9,1398.2 3341.4,1398.2 3367.5,1372.1 3367.5,1300.7 3381.1,1287.1 U1.A13@3381.1,1208.8 ; v2(3231.7,1980.6) 3251.5,1980.6 3252.2,1979.9 U3.B1@3252.6,1980.3
  BottomLayer w5.5: v3(3212.2,1500.1) 3212.2,1500.5 3185.3,1527.4 3185.3,1973.7 3191.7,1980.1 v2@3226.5,1980.1
DQ15: U1.C12 U3.B9 | length 927.7
  TopLayer w5.5: U1.C12@3349.76,1146.61 3349.76,1145.76 v2@3363.3,1159.3 ; U3.B9@3504.2,1980.4 3504,1980.6 v2(3524.4,1980.6)
  BottomLayer w5.5: v2@3365.3,1159.7 3365.3,1161.9 3505,1301.6 3505,1961.6 3524,1980.6 v2(3524.4,1980.6)
  other v2: 3363.5,1160
EMAC_CRSDV: R54.1 U1.E4 U10.15 | length 620.1
  TopLayer w5.5: U10.15@2614,1156 2642,1156 2651,1165 R54.1@2670,1165 ; R54.1@2670,1163 2670,1148 2675,1143 2747,1143 2761.2,1128.8 2761.2,1084.8 2804,1042 2957.1,1042 2977.5,1062.4 2977.8,1062.4 ; 2972.4,1057 2977.8,1062.4 ; U1.E4@3098,1083.4 3082,1099.4 3057.9,1099.4 3050.6,1092.1 3050.6,1075.6 3042.8,1067.8 2983.2,1067.8 2977.8,1062.4
EMAC_INT: R50.2 U1.D5 U10.18 | length 968.5
  TopLayer w5.5: U10.18@2606,1215 2621,1215 2628,1222 2628,1248 2635,1255 v3(2647,1255) ; U1.D5@3129.28,1115.11 3129.28,1114.88 3143.2,1128.8 v2(3143.2,1128.9)
  TopLayer w7: v3(2647,1255) R50.2@2670,1255
  BottomLayer w5.5: v3(2647,1255) 2562,1170 2562,1065 2585.2,1041.8 3057.1,1041.8 3143.2,1127.9 v2(3143.2,1128.9)
EMAC_MDC: U1.B3 U10.11 | length 605.4
  TopLayer w5.5: U10.11@2563,1093 2563,1074.41 2572.16,1065.25 2694.25,1065.25 2741,1112 v3(2741,1125) ; U1.B3@3066.29,1178.1 3066.29,1177.51 3078.5,1165.3 v2(3078.8,1165.3)
  BottomLayer w5.5: v3(2741,1125) 2876,1125 2916.3,1165.3 v2(3078.8,1165.3)
EMAC_MDIO: R62.1 U1.E3 U10.10 | length 629.8
  TopLayer w5.5: U10.10@2543,1093 2543,1077 2567,1053 2604,1053 2617,1040 2622,1040 ; R62.1@2623,1040 2692.75,1040 2707.75,1025 2983,1025 2994.4,1036.4 3075.3,1036.4 3082.1,1043.2 3082.1,1067.5 U1.E3@3066.3,1083.3
EMAC_REFCLK: U1.D1 U10.16 | length 453.7
  TopLayer w9: U10.16@2604,1176 2635,1176 2649,1190 2739,1190 2835.1,1093.9 2967,1093.9 2988.21,1115.11 U1.D1@3003.3,1115.11
EMAC_RST#: U1.C5 U10.24 | length 1023.8
  TopLayer w5.5: U10.24@2484,1243 2484,1259 2501,1276 v2@2501,1283 ; v2(3129,1062.6) 3129,1078 3113.5,1093.5 3113.5,1130.82 U1.C5@3129.28,1146.61
  BottomLayer w5.5: v2(2501,1284) 2477,1260 2477,1113 2559.9,1030.1 3095.4,1030.1 v2@3128,1062.7
EMAC_RX0: U1.D3 U10.13 | length 499.3
  TopLayer w5.5: v2(3052,1129) 3052,1128.4 3066.25,1114.15 3067.21,1115.11 U1.D3@3066.29,1115.11
  TopLayer w7: v3@2616,1101 v3(2617,1101) 2617,1097 v3@2618,1096
  TopLayer w8.6: U10.13@2606,1116 2606,1111 v3@2616,1101
  BottomLayer w8.6: v3(2617,1101) 2619.4,1101 2624.4,1096 3019,1096 v2(3052,1129)
EMAC_RX1: U1.D4 U10.12 | length 547.6
  TopLayer w5.5: v2(3083.7,1128.9) 3083.7,1128.4 3097.39,1114.71 U1.D4@3097.79,1115.11
  TopLayer w7.5: U10.12@2582,1092.75 2582,1093 U10.12@2582.25,1092.75 ; v3@2599,1083 v3@2599,1086
  TopLayer w8.6: U10.12@2582.25,1092.75 2592.25,1092.75 v3@2599,1086
  BottomLayer w8.6: v3(2600,1082) 2600.4,1082.4 3024.7,1082.4 3052.1,1109.8 3066.2,1109.8 v2@3084.8,1128.4
EMAC_RXERR: R55.1 U1.D2 U10.17 | length 726.9
  TopLayer w5.5: U10.17@2614,1195 2627,1195 v3(2647,1215) ; v3@2648,1215 R55.1@2670,1215 ; v3(2831,1060) 2956.9,1060 2996.2,1099.3 3018.98,1099.3 U1.D2@3034.8,1115.11
  BottomLayer w5.5: v3(2647,1215) 2575,1143 2575,1077 2598.2,1053.8 2772.9,1053.8 2779.1,1060 v3(2831,1060) v3@2832,1060
EMAC_TX0: U1.C1 U10.20 | length 564.8
  TopLayer w7.5: U10.20@2562.5,1237.5 U10.20@2563,1237
  TopLayer w8.6: U10.20@2562.5,1237.5 2562.5,1260.8 2586.9,1285.2 2748.4,1285.2 2794.5,1239.1 2794.5,1202.2 2863.2,1133.5 2959.9,1133.5 2973.01,1146.61 U1.C1@3003.3,1146.61
EMAC_TX1: U1.B2 U10.21 | length 627.6
  TopLayer w5.5: 2969.5,1162.4 3019.09,1162.4 U1.B2@3034.8,1178.1
  TopLayer w8.6: U10.21@2543,1238 2543,1260.6 2581.2,1298.8 2754.3,1298.8 2808.1,1245 2808.1,1207.9 2868.9,1147.1 2954.2,1147.1 2969.5,1162.4
EMAC_TXEN: U1.C2 U10.19 | length 567.8
  TopLayer w5.5: U10.19@2583,1239 2583,1250 2586,1253 v3(2601,1253) ; v3(2750,1236) 2750,1213 2847,1116 2965,1116 2979.8,1130.8 3018.99,1130.8 U1.C2@3034.8,1146.61
  BottomLayer w5.5: v3(2601,1253) 2621,1273 2673,1273 2710,1236 v3(2750,1236) v3@2754.3,1236
ETH_RXN: D15.2 R78.1 U10.3 | length 564.4
  TopLayer w7: D15.2@2202.2,1465 D15.2@2210,1472.8
  TopLayer w8.6: R78.1@2150,1465 D15.2@2202.2,1465 ; D15.2@2210,1472.8 2210,1427.2 2235.3,1401.9 2235.3,1332 2255.6,1311.7 2294.6,1311.7 2331.2,1275.1 2331.2,1181.2 2343.1,1169.3 2442.3,1169.3 2449,1176 U10.3@2460,1176
ETH_RXP: D15.3 R77.1 U10.4 | length 506.3
  TopLayer w7: D15.3@2178,1365 2184.7,1371.7 D15.3@2194.85,1381.85
  TopLayer w8.6: R77.1@2155,1365 D15.3@2178,1365 ; D15.3@2184.7,1371.7 2184.7,1304.3 2191,1298 2289,1298 2317.6,1269.4 2317.6,1175.4 2337.3,1155.7 2459.7,1155.7 U10.4@2460,1156
ETH_TXN: D14.2 R76.1 U10.5 | length 467.3
  TopLayer w7: D14.2@2206,1215 D14.2@2210,1211
  TopLayer w7.5: R76.1@2145,1215 R76.1@2150,1215
  TopLayer w8.6: R76.1@2150,1215 D14.2@2206,1215 ; D14.2@2210,1211 2210,1176.6 2236,1150.6 2236,1083.6 2256.3,1063.3 2296.2,1063.3 2353,1120.1 2431.1,1120.1 2447,1136 U10.5@2460,1136
ETH_TXP: D14.3 R75.1 U10.6 | length 399.3
  TopLayer w8.6: R75.1@2150,1115 2184.4,1115 2184.4,1055 2189.8,1049.6 2301.8,1049.6 2358.7,1106.5 2437,1106.5 2447.2,1116.7 U10.6@2459.3,1116.7
GND: C1.1 C2.1 C3.1 C4.1 C5.1 C6.1 C7.1 C8.1 C9.1 C10.1 C11.1 C12.1 C13.1 C14.1 C15.1 C16.1 C17.1 C18.1 C20.1 C21.1 C22.1 C23.1 C24.1 C25.1 C26.1 C27.1 C28.1 C29.1 C30.1 C31.1 C32.1 C33.1 C34.1 C35.1 C36.1 C37.1 C38.1 C39.1 C40.1 C41.1 C42.1 C43.1 C44.1 C45.1 C46.1 C47.1 C48.1 C49.1 C54.1 C55.1 C56.1 C57.1 C72.1 C74.1 C75.1 C76.1 C77.1 C78.1 C79.2 C80.1 C81.1 C82.1 C83.1 C84.1 C85.1 C86.1 C87.1 C88.1 C89.1 C90.1 C91.1 C92.1 C93.1 C94.1 C95.1 C96.1 C97.1 C98.1 C99.1 C100.1 C101.1 C104.1 C105.1 C106.1 C108.1 C109.1 C110.1 D10.1 D14.1 D15.1 D16.1 D17.1 J1.5 J3.5 K1.2 P1.9 P1.10 Q5.2 Q6.2 R4.2 R5.1 R12.1 R13.1 R17.1 R40.2 R44.2 R46.2 R49.2 R54.2 R55.2 R58.2 R61.1 R70.2 R72.1 R74.1 T1.7 T1.8 TP11.1 U1.B6 U1.B7 U1.D6 U1.H8 U1.H9 U1.H10 U1.J8 U1.J9 U1.J10 U1.K10 U1.M4 U1.P6 U1.T16 U1.U13 U2.C5 U2.F7 U2.K3 U2.K8 U3.A3 U3.A7 U3.B2 U3.B8 U3.D2 U3.D8 U3.E3 U3.E7 U3.F2 U3.F8 U3.H2 U3.H8 U3.J3 U3.J7 U3.K9 U3.N1 U3.P9 U6.6 U7.4 U8.4 U8.5 U8.6 U9.5 U10.22 U10.25 U11.2 U11.14 U11.17 U11.28 U11.29 U11.33 | length 5699.5
  TopLayer w8: U10.22@2523.15,1238.75 2523.15,1257.15 v2(2524,1258)
  TopLayer w10: C108.1@2150,1165 v2(2171,1165) ; C82.1@2155,1415 v2@2175,1415 ; D14.1@2260,1230 D14.1@2263,1233 ; D15.1@2260,1475 D15.1@2265,1480 ; v3@2358,1235 2359.2,1236.2 v3(2359.2,1240.5) 2374.5,1240.5 C110.1@2380,1235 ; v3@2359.4,1201.7 C86.1@2381.4,1201.7 ; v3(2424,1060) C94.1@2440,1060 ; C78.1@2430,1316 2430.2,1316.2 v2(2430.2,1340.7) ; C109.1@2470,1317 v3@2470,1335 ; v3(2555,959) C95.1@2555,977 ; v1(2595,150) U6.6@2625,150 ; v3(2595,959) R58.2@2595,980 ; R40.2@2625,60 v1(2650,60) ; C90.1@2695,1120 v3(2716,1120) ; v3@2695,1330 R74.1@2695,1350 ; R54.2@2710,1165 v3@2729,1165 ; R55.2@2710,1215 v3(2731,1215) ; v3(2735,1329) C106.1@2735,1350 ; v2@2745,1418 v2(2745,1419) C77.1@2745,1440 ; U9.5@2795,1455 v3(2822,1455) v3@2823,1455 ; R44.2@2855,1735 v1(2870,1735) ; R61.1@2860,1360 v3@2860,1380 ; v3@2878,1220 v3(2879,1220) R17.1@2900,1220 ; v3(2879,1180) C28.1@2900,1180 ; C96.1@2900,1360 v3(2900,1381) ; v3@2983,1270 v3(2984,1270) D16.1@3005,1270 ; v3(2984,1360) D17.1@3005,1360 ; C18.1@3020,1735 v3@3020,1756 ; 3030,1458 v3(3030,1449) C17.1@3030,1469 ; C14.1@3080,1305 v3@3080,1325 ; v3@3095,1913 v3(3095,1914) R49.2@3095,1935 ; U1.M4@3097.79,863.14 v2@3115.44,863.14 ; R13.1@3100,1808 v3(3100,1831) ; C105.1@3125,1305 v3(3125,1327) ; v3@3131,1980 C6.1@3155,1980 ; v3@3132,1940 C8.1@3155,1940 ; v3@3132,2020 C9.1@3155,2020 ; v3(3134,1705) C21.1@3155,1705 ; v3(3134,1751) 3134,1749 3132,1751 C22.1@3158,1751 ; v3(3134,1790) 3134,1794 3137,1791 3150,1791 C11.1@3154,1795 ; v3(3134,1830) C5.1@3157,1830 ; v3(3134,1885) C7.1@3158,1885 ; v2(3148.7,1101.8) 3148.7,1102.79 3160.9,1114.99 U1.D6@3160.78,1115.11 ; v3@3160,522 v3(3160,523) R72.1@3160,545 ; U1.P6@3160.78,800.15 v2@3160.78,817.98 ; U1.B6@3160.78,1178.1 v2@3174.08,1191.4 ; v2@3176.9,1191.4 3178.98,1191.4 U1.B7@3192.28,1178.1 ; C4.1@3195.1,1625.3 3195.1,1629.69 3199.35,1633.95 U3.N1@3252.3,1633.95 ; v2@3203.13,957.63 U1.J8@3223.77,957.63 ; v2@3204.53,989.13 U1.H8@3223.77,989.13 ; v2@3223.77,1009.47 U1.H8@3223.77,989.13 ; v2@3238.4,943 U1.J8@3223.77,957.63 ; v2@3238.9,972.76 U1.J8@3223.77,957.63 ; v2@3239.24,973.1 U1.H9@3255.27,989.13 ; v2@3239.5,973.4 U1.H8@3223.77,989.13 ; v2@3240.04,942.4 U1.J9@3255.27,957.63 ; v2@3240.4,972.5 U1.J9@3255.27,957.63 ; v2@3255.27,1008.43 U1.H9@3255.27,989.13 ; v2@3261,645 v2(3261.5,645) C12.1@3285,645 ; v2@3270.04,972.4 U1.J9@3255.27,957.63 ; v2@3270.37,1778 U3.H2@3283.8,1791.43 ; v2@3270.4,974 U1.H9@3255.27,989.13 ; v2@3270.5,973.9 U1.J10@3286.76,957.63 ; v2@3271.04,973.4 U1.H10@3286.76,989.13 ; v2@3271.3,942.17 U1.J10@3286.76,957.63 ; U3.F2@3283.8,1854.42 3315,1885.62 U3.E3@3315,1886 ; U3.D2@3283.8,1917.41 3314.21,1887 U3.E3@3315,1887 ; U3.B2@3283.8,1980.4 3284.4,1980.4 v2@3298,1994 ; U1.K10@3286.36,926.14 U1.K10@3286.76,926.14 ; v2@3286.76,906.24 U1.K10@3286.76,926.14 ; v2@3286.76,1009.04 U1.H10@3286.76,989.13 ; v2@3305.27,989.13 U1.H10@3286.76,989.13 ; v2@3305.96,926.14 U1.K10@3286.76,926.14 ; v2@3306.43,957.63 U1.J10@3286.76,957.63 ; v2@3314,2032 3315.29,2030.71 U3.A3@3315.29,2011.9 ; U3.J3@3315.29,1759.93 v2@3334.07,1759.93 ; v4@3368.9,690.3 3368.9,692.6 3381.25,704.95 U1.U13@3381.25,705.66 ; C10.1@3405,645 v2@3427.7,645 ; v2@3420.08,1885.92 U3.E7@3441.28,1885.92 ; v2@3422.07,1759.93 U3.J7@3441.28,1759.93 ; U3.A7@3441.28,2011.9 v2@3441.28,2031.72 ; v2@3458,1966 3458.37,1966 U3.B8@3472.77,1980.4 U3.B8@3472.4,1980.4 ; v2(3458.5,1903.1) U3.D8@3472.4,1917 ; v2@3460.19,1867 U3.F8@3472.77,1854.42 ; U3.H8@3472.77,1791.43 v2@3487,1805.65 ; U1.T16@3475.74,737.16 3475.74,737.54 v4@3488.3,750.1 ; v1(3495,2090) Q5.2@3495,2105 ; U3.P9@3504.27,1602.45 v2@3524.55,1602.45 ; U3.K9@3504.27,1728.44 3507.83,1732 3528,1732 v2@3529,1733 ; C35.1@3515,645 v2@3538,645 ; R12.1@3605,665 v2@3627.8,665 ; C15.1@3605,705 v2@3627.9,705 ; C31.1@3605,750 v2@3627.7,750 ; C20.1@3605,1665 v3@3628,1665 ; C24.1@3605,1750 v3(3626,1750) ; C16.1@3605,1790 v3(3626,1790) v3@3629,1790 ; C27.1@3605,1830 v3(3626,1830) ; C29.1@3605,1886 v3(3626,1886) ; C32.1@3605,1949 v3@3627,1949 ; C33.1@3605,2012 v3(3626,2012) v3@3629,2012 ; C34.1@3730,630 v1@3730,654.8 ; v1(3835,340) R46.2@3860,340 ; v2@3839,1211 3840,1210 3846,1210 3849.47,1213.47 U2.K8@3859.53,1213.47 ; C25.1@3850,630 v1(3850,655) v1@3850,656 ; U2.F7@3891.02,1087.48 3904,1100.46 v2(3904,1101) ; C36.1@3950,630 v1@3950,656 ; v2@3954.02,973.98 U2.C5@3954.02,992.99 ; v3@4015,796.8 R5.1@4015,820 ; U2.K3@4017.01,1213.46 v2@4037.56,1213.46 ; v1@4035,380 C55.1@4060,380 ; C30.1@4050,630 v1@4050,654.2 ; v1(4095,320) C76.1@4095,295 C76.1@4096,296 ; v1@4218.8,960 C83.1@4245,960 ; v1@4219.4,920 C87.1@4245,920 ; v3@4220,517 Q6.2@4220,555 ; v3@4241.3,740 C92.1@4265,740 ; v3@4241.6,700 C97.1@4265,700 ; v3@4243.6,660 C98.1@4265,660 ; v3@4244,785 C91.1@4265,785 ; v3@4266.4,825 C85.1@4290,825 ; v3(4314,865) C79.2@4335,865 ; U11.2@4356,775 v1(4395,775) ; C104.1@4365,440 v3@4388,440 ; R70.2@4365,480 v3@4387,480 ; U11.29@4427,814 4427,830 v3(4435,838) 4435,839 4443,831 U11.28@4443,814 ; v3(4459,629) U11.14@4459,656 ; v3(4514,460) R4.2@4525,460 ; U11.17@4514,679 v3(4538,679) ; C80.1@4540,855 v3@4562,855 ; C100.1@4580,650 v3(4601,650) ; C88.1@4585,815 v3@4607,815 ; C93.1@4600,710 v3(4621,710) ; C89.1@4600,775 v3(4621,775) ; C84.1@4620,915 v1@4646,915 ; C81.1@4620,955 v1(4645,955) ; C101.1@4640,523 C101.1@4640,525 v2(4661,525) v2@4663,525 ; 4640,545 v2(4661,545) ; C99.1@4640,565 v2(4661,565) ; U1.J9@3255.27,957.63 U1.K10@3286.76,926.14
  TopLayer w15: v2(3458.5,1903.1) v2@3458.5,1903.5 ; C101.1@4640,525 4640,545 ; 4640,544 C99.1@4640,565 ; v2(4793,557) 4793.4,557.4 J1.5@4830,557.4
  TopLayer w20: D14.1@2265,1235 v1(2265,1250) ; D15.1@2265,1480 v1(2265,1500) ; C49.1@2422,855 v1(2465,855) v1@2466,855 ; C49.1@2429,820 v1(2465,820) ; C49.1@2437,785 v1(2465,785) ; U8.4@2735,1535 v1(2780,1535) ; v1(2770,465) v1(2880,465) ; v1(2770,495) v1(2880,495) ; v1(2770,565) v1(2880,565) ; v1(2770,595) v1(2880,595) ; v1(2780,165) v1(2840,165) ; v1(2900,1535) U8.5@2945,1535 ; v1(2900,1585) U8.6@2945,1585 ; C74.1@2960,1735 v1(2985,1735) ; v1(3280,2210) K1.2@3355,2210 ; v1(3285,70) C57.1@3335,70 v1(3385,70) ; v1(3285,395) C54.1@3335,395 ; C54.1@3335,390 C54.1@3335,395 ; v1(3335,435) C54.1@3335,395 ; K1.2@3356,2211 K1.2@3355,2210 ; v1(3385,395) C54.1@3335,395 ; v1(3392,2210) K1.2@3355,2210 ; v1(3515,80) v1(3595,80) ; v1(3515,145) C56.1@3555,145 ; C56.1@3555,100 C56.1@3555,145 ; v1(3555,185) C56.1@3555,145 ; v1(3595,145) C56.1@3555,145 ; v1(3725,340) v1(3785,340) ; v1(3990,290) U7.4@4035,290 ; v3@4435,839 v3(4435,859) ; v1(4505,80) v1(4585,80) ; v1(4505,140) C75.1@4545,140 ; C75.1@4545,135 C75.1@4545,140 ; v1(4545,185) C75.1@4545,140 ; v1(4585,140) C75.1@4545,140
  TopLayer w25: v5(4260,55) v1(4340,55) ; v5(4260,95) D10.1@4285,95 ; D10.1@4285,100 v1(4285,125) ; v1@4315,120 v1(4315,125) 4315,95 v1(4340,95)
  BottomLayer w10: v2@3173.9,1074.1 3174.1,1074.3 C43.1@3174.1,1099.6 ; C47.1@3181,989 v2@3203.4,989 ; C48.1@3192,885 v2@3192,907.3 ; C44.1@3285,880 v2@3307.8,880 ; v2@3287,1011.1 C39.1@3287,1032 ; v2@3307.6,925.7 v2(3307.6,926) v2(3307.6,957.5) ; v2@3307.6,989 C45.1@3330,989 ; 3307.8,941.5 3308.3,942 C41.1@3330,942 ; v2@3328,1073 C38.1@3352,1073 ; C37.1@3337,846 v2@3337,868.2 ; C26.1@3345,690 v4@3368.8,690 ; C13.1@3365,2010 v1@3365,2032 ; C23.1@3410,2015 v1(3410,2040) v1@3410,2041 ; v2@3756.3,1145 C1.1@3778,1145 ; C42.1@3936,1258 v2@3936,1279.9 ; C3.1@4063,1105 v2@4085.8,1105 ; C2.1@4102,1025 v2@4125.4,1025 ; v1(4545,185) TP11.1@4545,230
  BottomLayer w20: C40.1@2395,1835 v1(2420,1835) ; C40.1@2395,1875 v1(2420,1875) ; C40.1@2400,1795 v1(2420,1795)
  other v1: 4034,380 3730,655 3950,655 4050,655 4395,695 4435,695 4475,695 4395,735 4435,735 4475,735 4435,775 4475,775 4645,915 4219.3,920 4219.1,959.7 2500,1130 2530,1165 2500,1200 2560,1200 3365,2035
  other v2: 3537.5,644.6 3428.4,645 3628.3,665.7 3628.4,704.8 3628.3,750.3 3160.9,819.1 3116.4,863.2 3336.9,869.3 3307,880.3 3286.7,906.8 3192,908.3 3239.3,941.9 3270.9,941.8 3203,957.5 3239.6,973.3 3271,973.3 3953.9,974.4 3203.4,988.6 3307.3,989.2 3223.4,1010.1 3255.1,1010.1 3286.5,1010.1 4125.7,1025 3331,1073 3174.1,1074.4 4086.1,1105.4 3756.5,1145.1 3176.5,1191.5 3838.6,1210.9 4036,1213.1 3936.1,1280.8 2171,1415 3522,1602 3231.5,1634.3 3528.7,1732.6 3336,1759.8 3421.6,1759.6 3270,1777.5 3487,1806 3459.5,1867.1 3297.5,1868.1 3421.4,1885.4 3297.9,1903 3458.5,1966.1 3297.5,1994.1 3315,2029 3441,2029
  other v3: 4386,439 4386,481 4219.8,518.5 4243.5,660.4 4243.8,700.1 4243.6,740.1 4243.8,785.4 4014.9,797 4606,815 4268.7,825.1 4561,855 2731,1165 2359.4,1200.9 3080,1327 2695,1329 2470.2,1340.9 2860,1381 3626,1665 3020,1757 3134,1940 3626,1949 3134,1980 3134,2020
  other v4: 3367.4,690.2 3488.5,750.2
NAND_ALE: U1.R13 U2.C4 | length 784
  TopLayer w5.5: U1.R13@3381.25,768.65 3381.25,767.35 3394.3,780.39 v2(3394.3,781.6) ; v2(3985.5,955.5) 3985.5,991.5 U2.C4@3986.5,992.5
  Mid Layer 2 w5.5: v2(3394.3,781.6) 3394.3,759.1 3413.3,740.1 3438.6,740.1 3456.5,722.2 3580.1,722.2 3591.35,733.45 3744.25,733.45 3966.3,955.5 v2(3985.5,955.5)
NAND_CLE: U1.P15 U2.D5 | length 603.2
  TopLayer w5.5: U1.P15@3444.25,800.15 3444.35,800.15 3460,815.8 3633.9,815.8 3694,875.9 3699.1,875.9 v3(3711.3,888.1) v3@3711.5,888.3 ; v2(3941.4,1011.6) 3942.5,1011.6 U2.D5@3954.6,1023.7
  BottomLayer w5.5: v3(3711.3,888.1) 3798.2,888.1 3921.7,1011.6 v2(3941.4,1011.6)
NAND_CS#: R3.1 U1.P12 U2.C6 | length 837.3
  TopLayer w5.5: U1.P12@3349.76,800.15 3363.2,786.71 v4(3363.2,786.6) ; U2.C6@3923,992.5 3923,909.2 3925.5,906.7 3925.5,883.2 3925,882.7 R3.1@3925,860
  Mid Layer 2 w5.5: v4(3363.2,786.6) 3363.2,759.8 3417.2,705.8 3587.1,705.8 3604,722.7 3764.5,722.7 3924.8,883 v2(3924.8,883.3)
NAND_D0: U1.N14 U2.H4 | length 739.8
  TopLayer w5.5: U1.N14@3412.75,831.65 3413.25,831.65 3412.95,831.35 3425.2,819.1 v2(3426,819.1) ; v2(3973,1137.7) 3973.5,1137.7 U2.H4@3985.9,1150.1
  Mid Layer 2 w5.5: v2@3426.1,819.6 3427.1,818.6 3693.6,818.6 3973,1098 v2(3973,1137.7)
NAND_D1: U1.R15 U2.J4 | length 742.2
  TopLayer w5.5: U1.R15@3444.25,768.65 3444.65,768.65 3460.4,784.4 3632.1,784.4 3691.2,843.5 v3(3691.2,843.9) ; v2(3971.6,1168.3) 3971.8,1168.3 3985.35,1181.85 U2.J4@3985.55,1181.65
  Mid Layer 2 w5.5: v3(3691.2,843.9) 3691.9,843.9 3943.4,1095.4 3943.4,1136.2 3971.9,1164.7 v2@3971.9,1171.4
NAND_D2: U1.M14 U2.K4 | length 744.9
  TopLayer w5.5: U1.M14@3412.75,863.14 3413.04,863.14 3425.2,875.3 v2(3425.2,876) ; v2(3985.4,1231.8) 3985.4,1214.4 3986.2,1213.6 U2.K4@3985.75,1213.15
  Mid Layer 2 w5.5: v2(3425.2,876) 3536.7,876 3892.5,1231.8 v2(3985.4,1231.8)
NAND_D3: U1.N16 U2.K5 | length 664
  TopLayer w5.5: U1.N16@3475.74,831.65 3475.74,831.74 3491.3,847.3 3615.8,847.3 3795.95,1027.45 v2@3795.95,1027.85 ; U2.K5@3954.02,1213.47 3954.02,1213.58 3967.3,1200.3 v2(3967.3,1200.1)
  Mid Layer 2 w5.5: v2(3796,1028.2) 3796,1028.6 3967.3,1199.9 3967.5,1199.9 v2@3967.7,1200.1
NAND_D4: U1.N17 U2.K6 | length 661.4
  TopLayer w5.5: U1.N17@3507.24,831.65 3626.95,831.65 3820.8,1025.5 3820.8,1158.9 3828.1,1166.2 3867.9,1166.2 3875.4,1173.7 3875.4,1191.5 3881.6,1197.7 3907.7,1197.7 3920.7,1210.7 U2.K6@3920.7,1213.1
NAND_D5: U1.N15 U2.J7 | length 620
  TopLayer w5.5: U1.N15@3444.25,831.65 3457.3,844.7 v2(3457.6,844.7) ; U2.J7@3887.9,1179.3 3893.8,1179.3 v2(3904,1169.1)
  Mid Layer 2 w5.5: v2(3457.6,844.7) 3475.8,862.9 3598.1,862.9 3904,1168.8 v2(3904,1169.1)
NAND_D6: U1.K15 U2.K7 | length 660.8
  TopLayer w5.5: U1.K15@3444.25,926.14 3460.08,910.3 3621.3,910.3 3783,1072 3783,1189.8 3822.5,1229.3 3875.9,1229.3 U2.K7@3891.1,1214.1
NAND_D7: U1.M15 U2.J8 | length 633.1
  TopLayer w5.5: U1.M15@3444.25,863.14 3444.25,874.15 3448.9,878.8 3616.4,878.8 3802.7,1065.1 3802.7,1185.3 3809.8,1192.4 3849.7,1192.4 U2.J8@3859.9,1182.2
NAND_OE#: U1.P13 U2.D4 | length 722.6
  TopLayer w5.5: U1.P13@3381.25,800.15 3381.25,818.55 v2(3381.3,818.6) ; v2@3971,1011.9 3971.9,1011 v2(3971.9,1010.8) ; v2@3971.6,1010.2 3985.51,1024.11 U2.D4@3985.51,1024.49
  Mid Layer 2 w5.5: v2(3381.3,818.6) v2@3381.9,818.6
  BottomLayer w5.5: v2@3381.9,818.6 3402.4,839.1 3436.5,839.1 3451.5,824.1 3758.1,824.1 3927.6,993.6 3954.7,993.6 v2(3971.9,1010.8)
NAND_R/B#: R2.1 U1.P14 U2.C8 | length 648.7
  TopLayer w5.5: U1.P14@3412.75,800.15 3412.75,799.75 3427.9,784.6 v2(3428.4,784.6) ; v2(3859.7,898.6) 3859.7,992.3 3859.3,992.7 U2.C8@3859.9,993.3 ; v2@3860,897.9 3860,900 3885,875 R2.1@3885,860
  Mid Layer 2 w5.5: v2(3428.4,784.6) 3746.2,784.6 3859.7,898.1 v2(3859.7,898.6)
NAND_WE#: U1.R14 U2.C7 | length 635
  TopLayer w5.5: U1.R14@3412.75,768.65 3424.5,756.9 v4(3424.8,756.9) ; v2(3891,925.1) 3891,974.08 ; 3891.02,973.82 3891.02,974.1 U2.C7@3891.02,992.99
  Mid Layer 2 w5.5: v4(3424.8,756.9) 3435.2,756.9 3451,772.7 3762.6,772.7 3891,901.1 v2(3891,925.1)
NAND_WP#: R5.2 U1.P8 U2.C3 | length 1232.3
  TopLayer w5.5: v2(3223.6,818.4) 3223.6,800.9 U1.P8@3225.3,799.2 ; R5.2@4015.3,860.3 4015.3,914.3 4017.01,916.01 U2.C3@4017.01,992.99 ; R5.2@4015.4,858.1 v3(4015.4,883.1)
  Mid Layer 2 w5.5: v2(3223.6,818.4) 3224.2,818.4 3243.4,837.6 3298.4,837.6 3313.57,822.42 3313.57,775.12 3328,760.7 3328,699.6 3362.9,664.7 3585.6,664.7 3606.9,686 3760.7,686 3833,758.3 3939.6,758.3 4015.4,834.1 v3(4015.4,883.1)
NetC10_2: C10.2 U1.U12 X1.1 | length 186.5
  TopLayer w5.5: U1.U12@3349.76,705.66 3349.76,677.04 3363.4,663.4 3363.4,604.7 3382,586.1 X1.1@3435.6,586.1
NetC12_2: C12.2 U1.T12 X1.3 | length 286.9
  TopLayer w5.5: X1.3@3261.5,504.2 3269.6,512.3 3299.2,512.3 3325.1,538.2 3325.1,665.4 3334.1,674.4 3334.1,721.5 U1.T12@3349.76,737.16
NetC15_2: C15.2 R12.2 U1.U17 | length 93.1
  TopLayer w10: U1.U17@3507.24,705.66 3563.26,705.66 3565.3,703.62 R12.2@3565.3,669.4
NetC18_2: C18.2 C19.2 L1.1 R11.2 | length 139
  TopLayer w10: L1.1@3020,1646 C18.2@3020,1695 ; L1.1@3060,1645 3060,1694 R11.2@3060,1695 C19.2@3060,1735
NetC19_1: C19.1 C21.2 C22.2 R11.1 R13.2 TP4.1 U3.J2 | length 353
  TopLayer w10: R11.1@3100,1695 C19.1@3100,1735 ; R13.2@3100,1770 C19.1@3100,1735 ; C22.2@3190,1752 3195,1747 3195,1728 ; C21.2@3195,1704 3195,1728 ; U3.J2@3283.8,1759.93 3263.87,1740 3221.8,1740 3209.8,1728 3195,1728 ; C19.1@3100,1735 3117,1735 3124,1728 3195,1728
  BottomLayer w10: TP4.1@3095,1728 v3(3123,1728)
NetC25_2: C25.2 C26.2 L2.1 U1.T13 | length 679.7
  TopLayer w10: v4(3369.1,724.9) 3369.1,725.01 U1.T13@3381.25,737.16
  TopLayer w20: L2.1@3850,532.4 L2.1@3850,535 C25.2@3850,590
  Mid Layer 3 w20: v4@3368.5,724.9 3391.5,701.9 3391.5,646 3436.8,600.7 3813.7,600.7 v1(3849.8,564.6)
  BottomLayer w10: C26.2@3347.1,730.1 3364.3,730.1 3369.1,725.3 v4(3369.1,724.9)
NetC28_2: C28.2 R16.1 R17.2 U1.B1 | length 195.1
  TopLayer w7: R16.1@2900,1260 2921,1260 2940,1241 R17.2@2940,1219.4 ; C28.2@2938.4,1179.3 2962.7,1179.3 ; R17.2@2939.2,1219.4 R17.2@2940,1219.4 ; R17.2@2940,1219 R17.2@2940,1219.4 ; U1.B1@3003.3,1178.1 3002.1,1179.3 2962.7,1179.3 ; R17.2@2940,1219.4 2956.3,1219.4 2962.7,1213 2962.7,1179.3
NetC30_2: C30.2 C31.2 L3.1 U1.T17 | length 764.1
  TopLayer w10: U1.T17@3507.24,737.16 3528.86,737.16 3541.2,749.5 C31.2@3565.6,749.5
  TopLayer w20: L3.1@4050,535 C30.2@4050,589.5
  BottomLayer w20: v1(3540.5,749.5) 3543.7,749.5 3573.1,778.9 3652.4,778.9 3676.3,755 3920,755 4018,657 4018,596.2 v1(4049.9,564.3)